# Altium PCB Capybara.PcbDoc (part 3 of 5)
Units mil, origin at the board's own origin, x right, y up, seen from the top; angles counter-clockwise.
Board outline 2270 x 2270 mil, 4 copper layers (Top Layer, GND, Signal, Bottom Layer), stack 61.8 mil thick; 394 components, 234 nets, 1155 pads, 211 vias.
Unrouted connection lines stored in the file: 4.
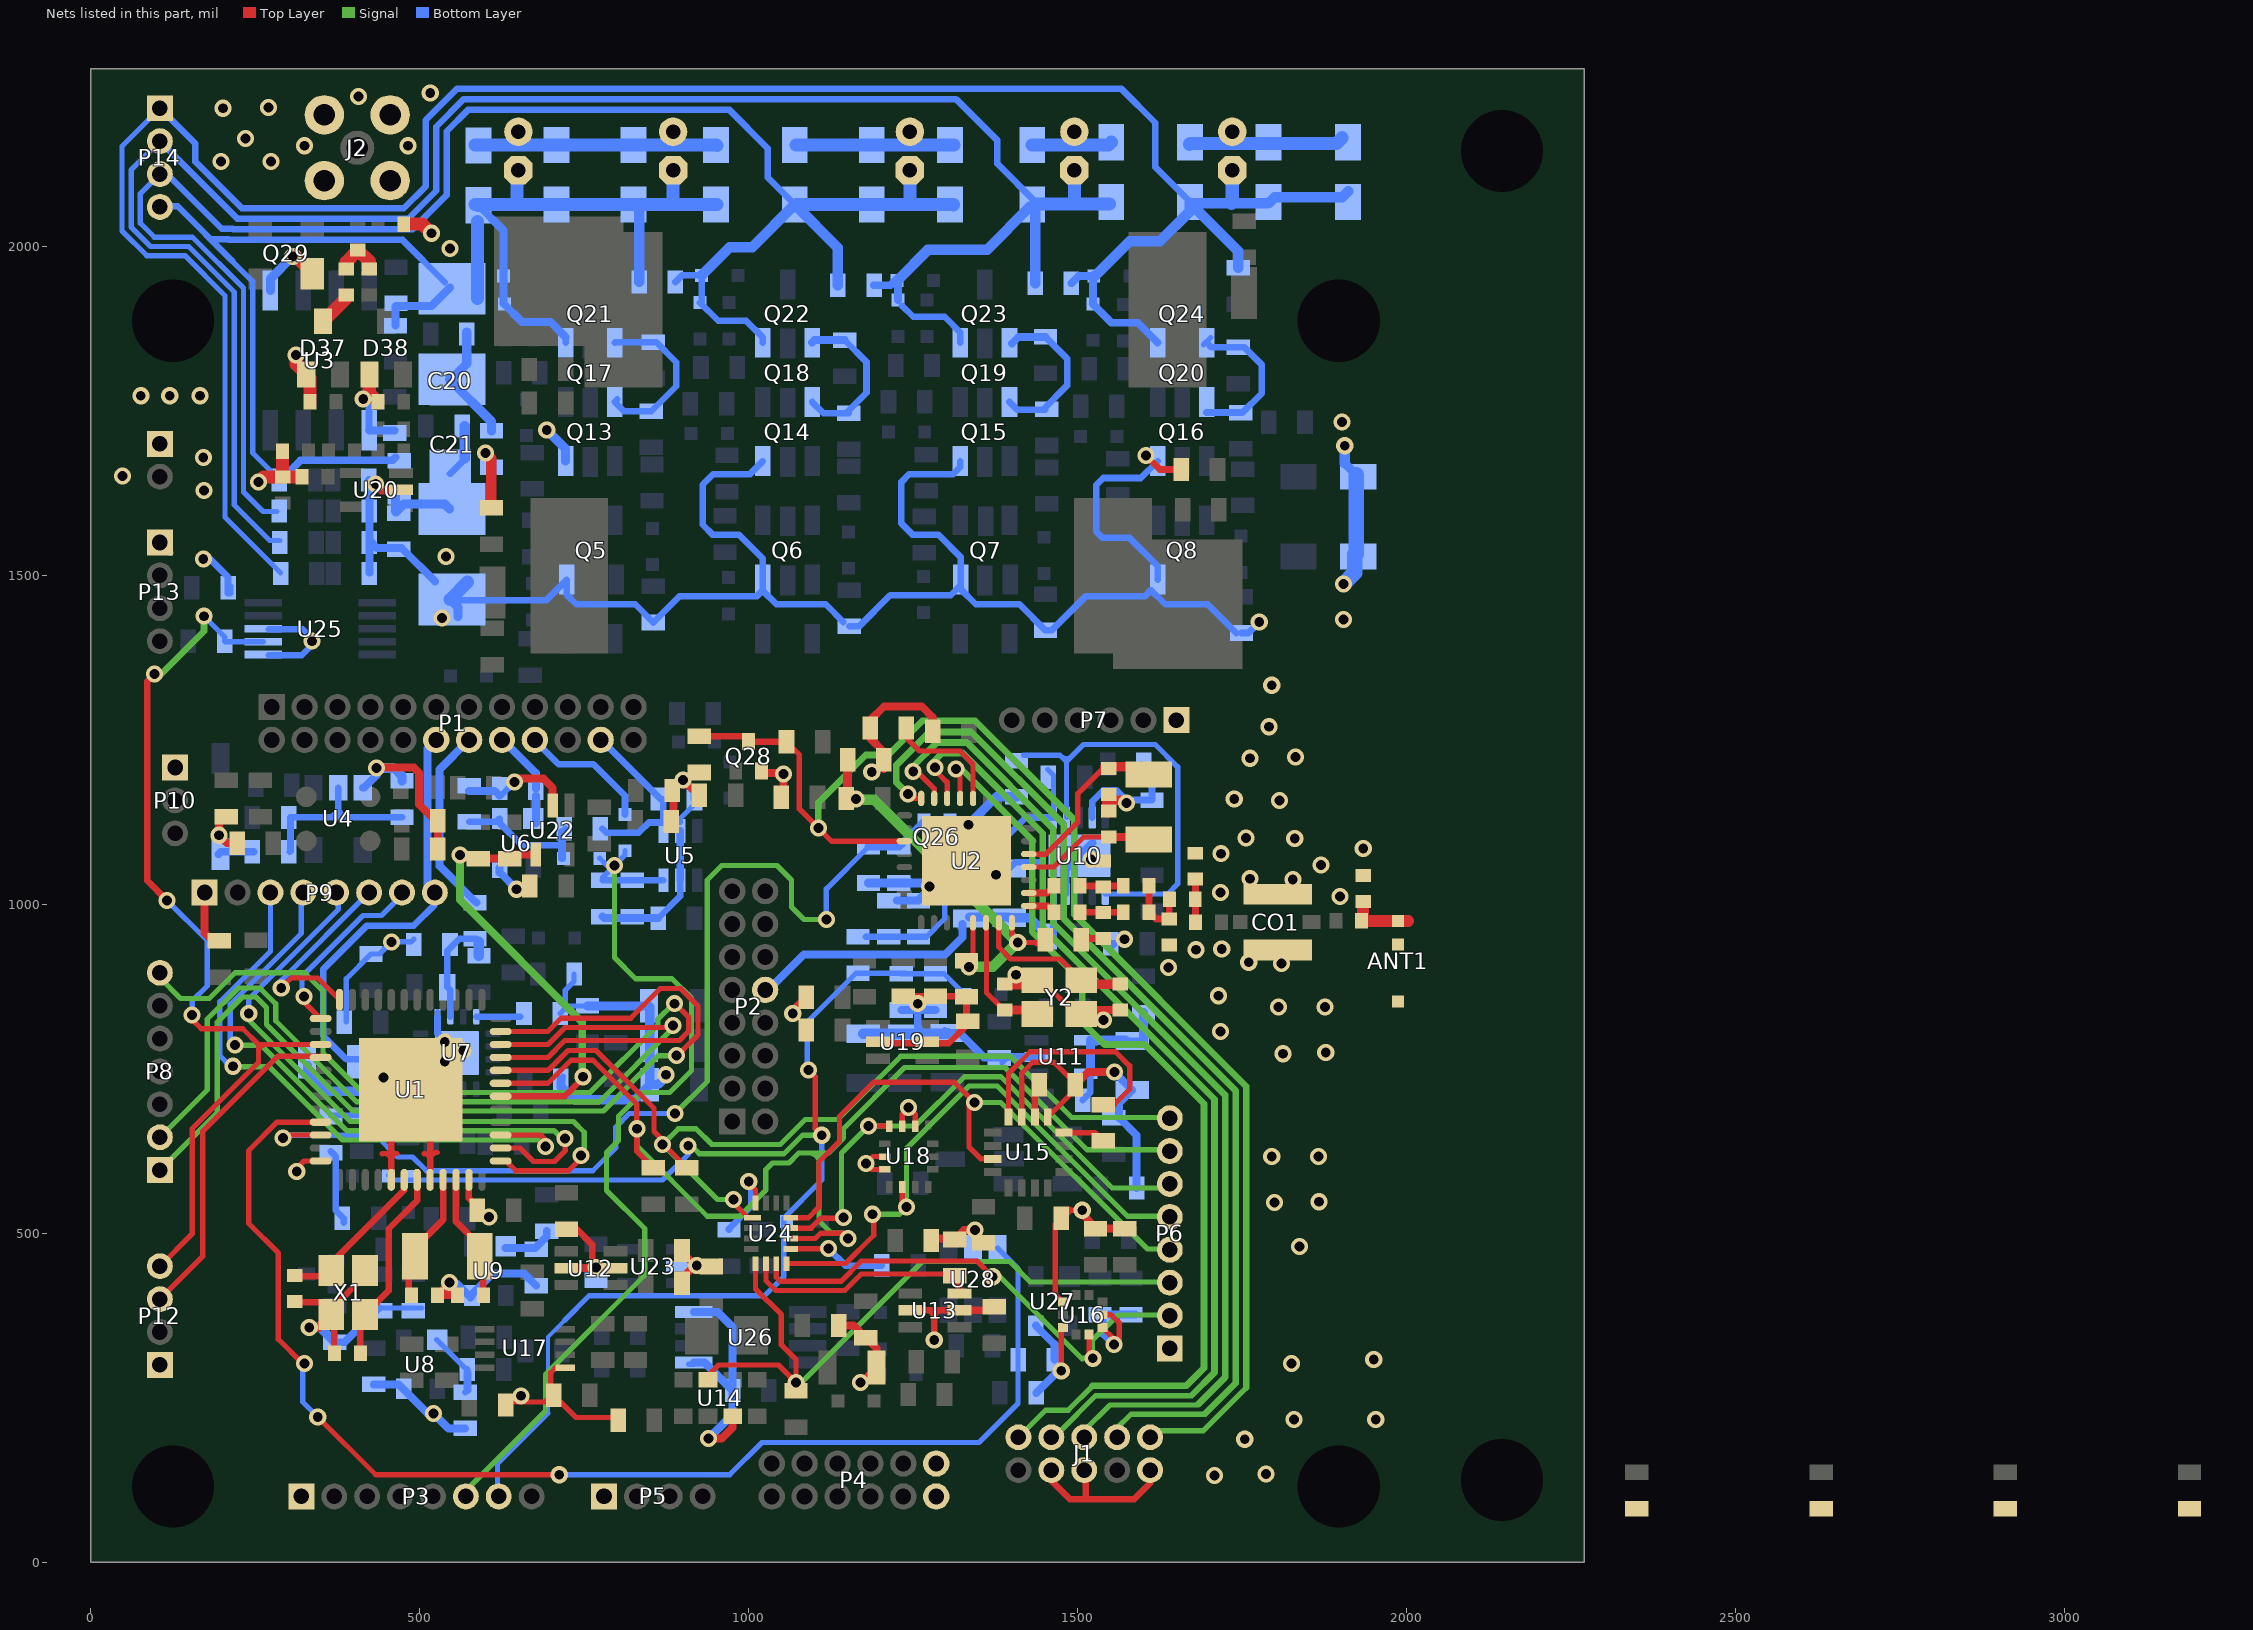
[diagram p4: the nets of this part, all layers, seen from the top]

## Part data (continued)
P2: Digi-Key Part Number=S9015E-08-ND, Manufacturer="Sullins Connector Solutions", Manufacturer Part Number=GRPB082VWVN-RC, Distributor=Digikey, Distributor Part Number=S9015E-08-ND
P3 P6 P9: "Header, 8-Pin", Digi-Key Part Number=952-3361-ND, Distributor Part Number=855-M52-5000845, Manufacturer="Harwin Inc.", Manufacturer Part Number=M52-5000845, Distributor=Mouser, LatestRevisionDate=17-Jul-2002, LatestRevisionNote="Re-released for DXP Platform.", Mouser Part Number=855-M52-5000845, Publisher="Altium Limited"
P4: Digi-Key Part Number=S9015E-06-ND, Manufacturer="Sullins Connector Solutions", Manufacturer Part Number=GRPB062VWVN-RC, Distributor=Digikey, Distributor Part Number=S9015E-06-ND
P5: "Header, 4-Pin", Digi-Key Part Number=952-3358-ND, Distributor Part Number=855-M52-5000445, Manufacturer="Harwin Inc.", Manufacturer Part Number=M52-5000445, Distributor=Mouser, LatestRevisionDate=17-Jul-2002, LatestRevisionNote="Re-released for DXP Platform.", Mouser Part Number=855-M52-5000445, Publisher="Altium Limited"
P7: "Header, 6-Pin", Digi-Key Part Number=952-3359-ND, Distributor Part Number=855-M52-5000645, Manufacturer="Harwin Inc.", Manufacturer Part Number=M52-5000645, Distributor=Digikey, LatestRevisionDate=17-Jul-2002, LatestRevisionNote="Re-released for DXP Platform.", Mouser Part Number=855-M52-5000645, Publisher="Altium Limited"
P8: "Header, 7-Pin", Digi-Key Part Number=952-3360-ND, Distributor Part Number=855-M52-5000745, Manufacturer="Harwin Inc.", Manufacturer Part Number=M52-5000745, Distributor=Mouser, LatestRevisionDate=17-Jul-2002, LatestRevisionNote="Re-released for DXP Platform.", Mouser Part Number=855-M52-5000745, Publisher="Altium Limited"
P10: "Header, 3-Pin", Digi-Key Part Number=952-3357-ND, Distributor Part Number=855-M52-5000345, Manufacturer="Harwin Inc.", Manufacturer Part Number=M52-5000345, Distributor=Mouser, LatestRevisionDate=17-Jul-2002, LatestRevisionNote="Re-released for DXP Platform.", Mouser Part Number=855-M52-5000345, Publisher="Altium Limited"
P11: "Header, 2-Pin", Digi-Key Part Number=SAM9931-ND, Manufacturer="Samtec Inc.", Manufacturer Part Number=SLM-102-01-S-S, Distributor=Digikey, Distributor Part Number=SAM9931-ND, LatestRevisionDate=17-Jul-2002, LatestRevisionNote="Re-released for DXP Platform.", Publisher="Altium Limited"
P12 P13 P14: library part MHDR1X4, "Header, 4-Pin", Digi-Key Part Number=952-3358-ND, Distributor Part Number=855-M52-5000445, Manufacturer="Harwin Inc.", Manufacturer Part Number=M52-5000445, Distributor=Mouser, LatestRevisionDate=17-Jul-2002, LatestRevisionNote="Re-released for DXP Platform.", Mouser Part Number=855-M52-5000445, Publisher="Altium Limited"
Q1 Q2 Q3 Q4 Q17 Q18 Q19 Q20 Q21 Q22 Q23 Q24 Q30: library part MOSFET-P, "P-Channel MOSFET", Digi-Key Part Number=1727-2531-1-ND, Distributor Part Number=771-PMV30XPEAR, Manufacturer=Nexperia, Manufacturer Part Number=PMV30XPEAR, Distributor=Mouser, Mouser Part Number=771-PMV30XPEAR
Q5 Q6 Q7 Q8 Q13 Q14 Q15 Q16 Q31: library part MOSFET-N, "N-Channel MOSFET", Digi-Key Part Number=SI2302CDS-T1-E3CT-ND, Distributor Part Number=781-SI2302CDS-E3, Manufacturer="Vishay Siliconix", Manufacturer Part Number=SI2302CDS-T1-E3, Distributor=Mouser, Mouser Part Number=781-SI2302CDS-E3
  Q16: Note=DB
Q9 Q10 Q11 Q12: library part MOSFET-N, "N-Channel MOSFET", Digi-Key Part Number=DMN65D8L-7DICT-ND, Distributor Part Number=621-DMN65D8L-7, Manufacturer="Diodes Incorporated", Manufacturer Part Number=DMN65D8L-7, Distributor=Mouser, Mouser Part Number=621-DMN65D8L-7
Q25 Q26 Q28: library part MOSFET-N, "N-Channel MOSFET", Distributor Part Number=FDY302NZCT-ND, Manufacturer=Fairchild, Manufacturer Part Number=FDY302NZ, Distributor=Digi-Key
Q27: library part "Photo NPN", "NPN Phototransistor", Digi-Key Part Number=475-1268-1-ND, Distributor Part Number=720-SFH3710-3/4-Z, Manufacturer="OSRAM Opto Semiconductors Inc", Manufacturer Part Number="SFH 3710-3/4-Z", Distributor=Mouser, Mouser Part Number=720-SFH3710-3/4-Z
Q29: "N-Channel RF MOSFET 1GHz, 40mA", Digi-Key Part Number=BF2040E6814HTSA1CT-ND, Distributor Part Number=726-BF2040E6814HTSA1, Manufacturer="NXP Semiconductors", Manufacturer Part Number=BF2040E6814HTSA1, Distributor=Mouser, Mouser Part Number=726-BF2040E6814HTSA1
R1 R2 R3 R4 R77 R83 R85 R97 R112 R113 R114: "Chip Resistor (Surface Mount)", Distributor Part Number=311-47KDCT-ND, Manufacturer=Yageo, Manufacturer Part Number=RT0603DRD0747KL, Distributor=Digi-Key
R5 R6 R7 R8 R52 R64 R65: "Chip Resistor (Surface Mount)", Distributor Part Number=311-1.00MHRCT-ND, Manufacturer=Yageo, Manufacturer Part Number=RC0603FR-071ML, Distributor=Digi-Key
  R52: Note=DNP
R9 R10 R11 R12 R17 R18 R19 R20 R21 R22 R23 R24 R45 R58 R73 R79 R128 R129: library part Res, "Chip Resistor (Surface Mount)", Distributor Part Number=311-0.0GRCT-ND, Manufacturer=Yageo, Manufacturer Part Number=RC0603JR-070RL, Distributor=Digi-Key
  R58 R73 R79: Note=DNP
R13 R14 R15 R16: library part Res, "Chip Resistor (Surface Mount)", Distributor Part Number=311-470KHRCT-ND, Manufacturer=Yageo, Manufacturer Part Number=RC0603FR-07470KL, Distributor=Digi-Key
  R16: Note=DB
R25 R26 R27 R28 R29 R30 R31 R32 R33 R34 R35 R36 R37 R40 R41 R42 R43 R44 R46 R47 R49 R50 R54 R56 R59 R60 R61 R62 R63 R74 R75 R76 R80 R87 R88 R105: "Chip Resistor (Surface Mount)", Distributor Part Number=311-0.0GRCT-ND, Manufacturer=Yageo, Manufacturer Part Number=RC0603JR-070RL, Distributor=Digi-Key
  R29 R30 R31 R32 R40 R63 R87 R88: Note=DNP
  R33: Config=top, Note=DNP
  R34: Config=*,series, Note=DNP
  R35: Config=bottom,series, Note=DNP
  R36 R37: Config=parallel
  R59: Note=BRIDGE
R38 R39 R92 R94 R95 R115: "Chip Resistor (Surface Mount)", Distributor Part Number=311-10.0KHRCT-ND, Manufacturer=Yageo, Manufacturer Part Number=RC0603FR-0710KL, Distributor=Digi-Key
  R38 R39: Note=DNP
R48: "Chip Resistor (Surface Mount)", Distributor Part Number=311-47GRCT-ND, Manufacturer=Yageo, Manufacturer Part Number=RC0603JR-0747RL, Distributor=Digi-Key
R51: "Chip Resistor (Surface Mount)", Manufacturer=Yageo, Distributor=Digi-Key
R53 R57 R86 R89 R90 R96 R98 R108 R125 R131: "Chip Resistor (Surface Mount)", Distributor Part Number=311-10MGRCT-ND, Manufacturer=Yageo, Manufacturer Part Number=RC0603JR-0710ML, Distributor=Digi-Key
R55: "Chip Resistor (Surface Mount)", Distributor Part Number=541-1.37MLCT-ND, Manufacturer="Vishay Dale", Manufacturer Part Number=CRCW04021M37FKED, Distributor=Digi-Key
R66: "Chip Resistor (Surface Mount)", Distributor Part Number=YAG2319CT-ND, Manufacturer=Yageo, Manufacturer Part Number=RT0603FRE07100KL, Rating=1%, Distributor=Digi-Key
R67: "Chip Resistor (Surface Mount)", Distributor Part Number=541-8.20MHCT-ND, Manufacturer="Vishay Dale", Manufacturer Part Number=CRCW06038M20FKEA, Rating=1%, Distributor=Digi-Key
R68: "Chip Resistor (Surface Mount)", Distributor Part Number=71-CRCW0603-2.43M-E3, Manufacturer=Vishay, Manufacturer Part Number=CRCW06032M43FKEA, Distributor=Mouser, Mouser Part Number=71-CRCW0603-2.43M-E3
R69: "Chip Resistor (Surface Mount)", Distributor Part Number=311-4.70MHRCT-ND, Manufacturer="Generic Chip Res (TBD)", Manufacturer Part Number=RC0603FR-074M7L, Rating=1%, Distributor=Digi-Key
R70 R71: "Chip Resistor (Surface Mount)", Distributor Part Number=YAG3327CT-ND, Manufacturer=Yageo, Manufacturer Part Number=RC0603FR-071M6L, Rating=1%, Distributor=Digi-Key
R72: "Chip Resistor (Surface Mount)", Distributor Part Number=541-3.30MHCT-ND, Manufacturer="Vishay Dale", Manufacturer Part Number=CRCW06033M30FKEA, Rating=1%, Distributor=Digi-Key
R78: "Chip Resistor (Surface Mount)", Distributor Part Number=311-820KHRCT-ND, Manufacturer=Yageo, Manufacturer Part Number=RC0603FR-07820KL, Distributor=Digi-Key
R81: "Chip Resistor (Surface Mount)", Distributor Part Number=311-200KHRCT-ND, Manufacturer=Yageo, Manufacturer Part Number=RC0603FR-07200KL, Distributor=Digi-Key
R82 R130 R132 R133 R134 R135: "Chip Resistor (Surface Mount)", Manufacturer="Generic Chip Res (TBD)"
  R82: Note=DNP
R84: "Chip Resistor (Surface Mount)", Distributor Part Number=311-2543-1-ND, Manufacturer=Yageo, Manufacturer Part Number=RT0603DRE0733KL, Distributor=Digi-Key
R91: "Chip Resistor (Surface Mount)", Distributor Part Number=MCT0603-22.0-CFCT-ND, Manufacturer="Vishay Beyschlag", Manufacturer Part Number=MCT06030C2209FP500, Distributor=Digi-Key
R93 R103 R124 R126: "Chip Resistor (Surface Mount)", Distributor Part Number=YAG2319CT-ND, Manufacturer=Yageo, Manufacturer Part Number=RT0603FRE07100KL, Distributor=Digi-Key
R99: "Chip Resistor (Surface Mount)", Distributor Part Number=P0.0JCT-ND, Manufacturer="Panasonic Electronic Components", Manufacturer Part Number=ERJ-2GE0R00X, Distributor=Digi-Key
R100: "Chip Resistor (Surface Mount)", Digi-Key Part Number=P560KLCT-ND, Manufacturer=Panasonic, Manufacturer Part Number=ERJ-2RKF5603X, Distributor=Digi-Key, Distributor Part Number=P560KLCT-ND
R101: "Chip Resistor (Surface Mount)", Digi-Key Part Number=P22.0KLCT-ND, Manufacturer=Panasonic, Manufacturer Part Number=ERJ-2RKF2202X, Distributor=Digi-Key, Distributor Part Number=P22.0KLCT-ND
R102: "Chip Resistor (Surface Mount)", Digi-Key Part Number=P220KLCT-ND, Manufacturer=Panasonic, Manufacturer Part Number=ERJ-2RKF2203X, Distributor=Digi-Key, Distributor Part Number=P220KLCT-ND
R104: "Chip Resistor (Surface Mount)", Distributor Part Number=541-1.5KGCT-ND, Manufacturer="Vishay Dale", Manufacturer Part Number=CRCW06031K50JNEA, Distributor=Digi-Key
R106: "Chip Resistor (Surface Mount)", Distributor Part Number=311-750KHRCT-ND, Manufacturer=Yageo, Manufacturer Part Number=RC0603FR-07750KL, Distributor=Digi-Key
R107: "Chip Resistor (Surface Mount)", Distributor Part Number=311-240KHRCT-ND, Manufacturer=Yageo, Manufacturer Part Number=RC0603FR-07240KL, Distributor=Digi-Key
R109: "Chip Resistor (Surface Mount)", Distributor Part Number=541-4.22MHCT-ND, Manufacturer="Vishay Dale", Manufacturer Part Number=CRCW06034M22FKEA, Distributor=Digi-Key
R110 R111: "Chip Resistor (Surface Mount)", Distributor Part Number=311-4.7KJRCT-ND, Manufacturer=Yageo, Manufacturer Part Number=RC0402JR-074K7L, Distributor=Digi-Key
R116 R117 R118 R119: "Chip Resistor (Surface Mount)", Distributor Part Number=311-4.70MHRCT-ND, Manufacturer="Generic Chip Res (TBD)", Manufacturer Part Number=RC0603FR-074M7L, Distributor=Digi-Key
R120 R121 R122 R123: "Chip Resistor (Surface Mount)", Distributor Part Number=541-20MAHCT-ND, Manufacturer="Vishay Dale", Manufacturer Part Number=CRCW060320M0JPEAHR, Distributor=Digi-Key
R127: library part Res, "Chip Resistor (Surface Mount)", Distributor Part Number=311-330KHRCT-ND, Manufacturer=Yageo, Manufacturer Part Number=RC0603FR-07330KL, Distributor=Digi-Key
S1 S2: library part TrisolX_Solar_Wings, "TrisolX Solar Wings", DataSheet=http://www.trisolx.com/wp-content/uploads/2015/03/TrisolX-Solar-Wing-Data-Sheet1.pdf, Manufacturer=TrisolX, Manufacturer Part Number="TrisolX Solar Wings"
U1: library part "MSP430FR5994 48-pin", "MSP430 - 48LQFP or 48QFN", Digi-Key Part Number=296-45416-1-ND, Distributor Part Number=595-P430FR5994IRGZR, Manufacturer="Texas Instruments", Manufacturer Part Number=MSP430FR5994IRGZR, Distributor=Mouser, Mouser Part Number=595-P430FR5994IRGZR
U2: "Imported", Alternate_PartNumber=CC2650F128RHBT, Digi-Key Part Number=296-41955-1-ND, Distributor Part Number=595-CC2650F128RHBT, Manufacturer="Texas Instruments", CompType=IC, Distributor=Mouser, Manufacturer Part Number=CC2650F128RHBT, MountType=SMT, Mouser Part Number=595-CC2650F128RHBT, PackageReference=RHB0032E, PartNumber=CC2650F128RHBR, PIN_COUNT=33, RefDes=RefDes, RoHS=Y, TYPE=TYPE
U3: library part ALD9100xx, Digi-Key Part Number=1014-1281-5-ND, Manufacturer="Advanced Linear Devices Inc.", Manufacturer Part Number=ALD910021SAL, Mouser Part Number=585-ALD910021SAL, Distributor=Digikey, Distributor Part Number=1014-1281-5-ND
U4: "IC DETECTOR OPEN-DRAIN", Digi-Key Part Number=NCP301HSN30T1GOSCT-ND, Distributor Part Number=863-NCP301HSN30T1G, Manufacturer="ON Semiconductor", Manufacturer Part Number=NCP301HSN30T1G, Distributor=Mouser, Mouser Part Number=863-NCP301HSN30T1G, Name=NCP301HSN
U5 U12 U13 U19: library part SIP32431, Digi-Key Part Number=SIP32431DR3-T1GE3CT-ND, Distributor Part Number=781-SIP32431DR3-GE3, Manufacturer="Vishay Semiconductors", Manufacturer Part Number=SIP32431DR3-T1GE3, Distributor=Mouser, Mouser Part Number=781-SIP32431DR3-GE3
U6: "IC DETECTOR OPEN-DRAIN", Digi-Key Part Number=BU4917F-TR-ND, Distributor Part Number=BU4917F-TR, Manufacturer="ROHM Semiconductor", Mouser Part Number=755-BU4917F-TR, Distributor="Quest Components", Manufacturer Part Number=BU4917F-TR, Name=BU49
U7: Digi-Key Part Number=296-29741-1-ND, Distributor Part Number=595-BQ25504RGTR, Manufacturer=BQ25504RGTT, Manufacturer Part Number="Texas Instruments", Distributor=Mouser, Mouser Part Number=595-BQ25504RGTR
U8 U9: "IC DETECTOR CMOS", Digi-Key Part Number=BU4924F-TR-ND, Distributor Part Number=BU4924F-TR, Manufacturer="ROHM Semiconductor", Mouser Part Number=755-BU4924F-TR, Distributor="Quest Components", Manufacturer Part Number=BU4924F-TR, Name=BU49
U10: Digi-Key Part Number=296-27017-1-ND, Manufacturer="Texas Instruments", Manufacturer Part Number=TPS61200DRCR, Mouser Part Number=595-TPS61200DRCR, Distributor=Digi-Key, Distributor Part Number=296-27017-1-ND
U11: library part CMP-0329-00079-2, "Low-Input Voltage 40 mA Current Limited Load Switch, 400 mOhms rDS(On), -40 to 85 degC, 5-pin SC70 (DCK), Green (RoHS & no Sb/Br)", Adjustable Current Limit(Min)(A)=0.04, Digi-Key Part Number=296-25316-1-ND, Manufacturer="Texas Instruments", Mouser Part Number=595-TPS22943DCKR, Code_JEDEC=MO-203-AA, ComponentLink1Description=Datasheet, ComponentLink1URL=http://www.ti.com/general/docs/lit/getliterature.tsp?genericPartNumber=TPS22943&fileType=pdf, DatasheetVersion=SLVS832C, Distributor=Digi-Key, Distributor Part Number=296-25316-1-ND, Eco-Plan="Green (RoHS & no Sb/Br)", Enable/Shutdown="Active High", Iq(Typ)(uA)=40, Manufacturer Part Number=TPS22943DCKR, Mounting Technology="Surface Mount", Note=DNP, Number of FETs=1, PackageDescription="5-Pin Plastic Small-Outline Package, 2 x 1.3 mm Body, 0.65 mm Pitch, 2.1 mm Lead Span", PackageReference=DCK0005A, PackageVersion="revG, Jan-2007", PartNumber=TPS22943DCKR, rDS(on) per FET(Typ)(mOhms)=400, SubFamily="Current Limited Switch", Vin(Max)(V)=5.5, Vin(Min)(V)=1.62
U14: "Avago APDS-9960 digital proximity, ambient light, RGB, and gesture sensor.", Digi-Key Part Number=516-3480-1-ND, Distributor Part Number=630-APDS-9960, Manufacturer="Broadcom Limited", Distributor=Mouser, Manufacturer Part Number=APDS-9960, Mouser Part Number=630-APDS-9960, PROD_ID=SEN-12005
U15: "IC COMPASS 3 AXIS I2C 16LCC SMD", Digi-Key Part Number=342-1082-1-ND, Manufacturer=Honeywell, Manufacturer Part Number=HMC5883L-TR, Distributor=eBay
U16: Digi-Key Part Number=497-16265-1-ND, Distributor Part Number=511-LPS22HBTR, Manufacturer=STMicroelectronics, Manufacturer Part Number=LPS22HBTR, Distributor=Mouser, Mouser Part Number=511-LPS22HBTR
U17: "I2C Level Shifter", Digi-Key Part Number=296-46174-1-ND, Distributor Part Number=595-PCA9306DCURG4, Manufacturer="Texas Instruments", Manufacturer Part Number=PCA9306DCURG4, Distributor=Mouser, Mouser Part Number=595-PCA9306DCURG4
U18: Digi-Key Part Number=497-15383-1-ND, Distributor Part Number=511-LSM6DS3TR, Manufacturer="ST Microelectronics", Manufacturer Part Number=LSM6DS3TR, Distributor=Mouser, Mouser Part Number=511-LSM6DS3TR, Name=LSM6DS3, PurchaseNote="or Farnell 2474253"
U20: library part NCS2200, "Comparator: On Semi 10uA Comparator", Digi-Key Part Number=NCS2200SQ2T2GOSCT-ND, Distributor Part Number=863-NCS2200SQ2T2G, Manufacturer="ON Semiconductor", Manufacturer Part Number=NCS2200SQ2T2G, Distributor=Mouser, Mouser Part Number=863-NCS2200SQ2T2G
U21: "Knowles Analog Top MEMS Microphone", Digi-Key Part Number=423-1134-1-ND, Distributor Part Number=721-SPU0414HR5H-SB, Manufacturer=Knowles, Manufacturer Part Number=SPU0414HR5H-SB, Distributor=Mouser, Mouser Part Number=721-SPU0414HR5H-SB
U22: library part "OPA333, 2333", "Low power opamp", Digi-Key Part Number=MAX9914EXK+TCT-ND, Distributor Part Number=700-MAX9914EXKT, Manufacture="Maxim Integrated", Manufacture Part Number=MAX9914EXK+T, Distributor=Mouser, Mouser Part Number=700-MAX9914EXKT
U23: library part "OPA333, 2333", "Low power opamp", Digi-Key Part Number=296-47441-1-ND, Distributor Part Number=595-TLV521DCKR, Manufacturer="Texas Instruments", Manufacturer Part Number=TLV521DCKR, Distributor=Mouser, Mouser Part Number=595-TLV521DCKR
U24: Digi-Key Part Number=FXL6408UMXCT-ND, Distributor Part Number=512-FXL6408UMX, Manufacturer="ON Semiconductor / Fairchild", Manufacturer Part Number=FXL6408UMX, Distributor=Mouser, Mouser Part Number=512-FXL6408UMX, Name=FXL6408
U25: Digi-Key Part Number=296-38849-1-ND, Manufacturer="Texas Instruments", Manufacturer Part Number=ADS1115IDGSR, Mouser Part Number=595-ADS1115IDGSR, Distributor=Digikey, Distributor Part Number=296-38849-1-ND
U26: Digi-Key Part Number=MCP4541-104E/MS-ND, Distributor Part Number=579-MCP4541-104E/MS, Manufacturer=Microchip, Manufacturer Part Number=MCP4541T-104E/MS, Distributor=Mouser, Mouser Part Number=579-MCP4541-104E/MS
U27: "IC DETECTOR CMOS", Digi-Key Part Number=BU4917F-TR-ND, Distributor Part Number=BU4917F-TR, Manufacturer="ROHM Semiconductor", Mouser Part Number=755-BU4917F-TR, Distributor="Quest Components", Manufacturer Part Number=BU4917F-TR, Name=BU49
U28: Digi-Key Part Number=296-12134-1-ND, Distributor Part Number=595-REG710NA-2.7/250, Manufacturer="Texas Instruments", Manufacturer Part Number=REG710NA-2.7/250, Distributor=Mouser, Mouser Part Number=595-REG710NA-2.7/250
X1: library part "XTAL 4-pins", "Crystal - 4-Pin Surface Mount", Digi-Key Part Number=XC1557CT-ND, Distributor Part Number=520-ECS-240-8-36CKM, Manufacturer="ECS Inc.", Manufacturer Part Number=ECS-240-8-36CKM-TR, Rating=8pF, Distributor=Mouser, Mouser Part Number=520-ECS-240-8-36CKM
X2: library part "XTAL 2-pins", "Crystal - 2-Pin Surface Mount", Digi-Key Part Number=XC2162CT-ND, Distributor Part Number=520-.327-6-34QCST, Manufacturer="ECS Inc.", Manufacturer Part Number=ECS-.327-6-34QCS-TR, Rating=6pF, Distributor=Mouser, Mouser Part Number=520-.327-6-34QCST
Y1: library part XTAL, "Crystal Oscillator", Digi-Key Part Number=XC2162CT-ND, Distributor Part Number=520-.327-6-34QCST, Manufacturer="ECS Inc.", Manufacturer Part Number=ECS-.327-6-34QCS-TR, Rating=6pF, Distributor=Mouser, Mouser Part Number=520-.327-6-34QCST
Y2: library part ABM11_CERAMIC_SMD_CRYSTALABM11, Digi-Key Part Number=XC1557CT-ND, Distributor Part Number=520-ECS-240-8-36CKM, Manufacturer="ECS Inc.", Manufacturer Part Number=ECS-240-8-36CKM-TR, Rating=8pF, Distributor=Mouser, Mouser Part Number=520-ECS-240-8-36CKM

## Free pads (board coordinates)
  round 110 hole 125 unplated paste-200 mask-200: 2(2145,2145) 3(125,115) 3(125,1887) 3(1897,115) 3(1897,1887) 3(2145,125)

## Via types
v1: diameter 26, hole 15, Top Layer to Bottom Layer, tented both sides, 209 vias
v2: diameter 26, hole 15, Top Layer to Bottom Layer, tented bottom, 2 vias

## Nets (pads, with @x,y where several pads share a name; then routed paths per layer and width w, separated by ;. In a path a pad name is that pad's centre, name@x,y a point inside that pad or via, vN(x,y) a via of type N, cw(c..) or ccw(c..) an arc to the next point about the centre after c; other vN are vias at no path point)
ANT_N: C90.2 U2.2 | length 43.2
  Top Layer w10.42: U2.2@1425.59,1017.28 1453.59,1017.28 C90.2@1464.31,1028
ANT_P: C87.2 U2.1 | length 42.7
  Top Layer w10.42: U2.1@1425.59,997.59 1454.72,997.59 C87.2@1464.31,988
APDS_INT: P6.3 R92.1 U14.2 U24.5 | length 1013.2
  Top Layer w8: U14.2@938.07,277.13 938.07,284.07 954,300 1045,300 v1(1072,273) 1072,308 1049.56,330.44 1049.56,376.44 1010.38,415.62 U24.5@1010.38,454
  Signal w8: v1(1072,273) 1080,273 1264,457 1397,457 1428,426 P6.3@1631,426
APDS_SW: R89.2 U13.3 U24.6 | length 373.7
  Top Layer w8: U24.6@1026.13,454 1026.13,427.87 1041,413 1146,413 1171,438 1314.56,438 1317.56,435 1320.4,437.84 R89.2@1324,441.44
  Top Layer w12: U13.3@1320.4,408.59 R89.2@1320.4,437.84
AUX_0: P9.5 U1.1 | length 994.7
  Top Layer w8: U1.1@623,609.89 631.11,609.89 646,595 726,595 v1@751,620
  Signal w8: v1@233,834 233,831.4 394.4,670 733.53,670 750,653.53 v1@750,626
  Bottom Layer w8: v1(240,834) 240,856.19 376,992.19 P9.5@376,1007
  other v1: 745,618
AUX_1: P9.4 U1.2 | length 972.9
  Top Layer w8: U1.2@623,629.57 652.43,629.57 673,609 705,609 721,625 v1(721,644)
  Signal w8: v1@214,786 258.6,786 388.6,656 704,656 v1@724,636
  Bottom Layer w8: v1(219,786) 212,793 212,847.99 320,955.99 P9.4@320,1007
AUX_2: P9.3 U1.3 | length 910.2
  Top Layer w8: U1.3@623,649.26 683.74,649.26 v1@695,638
  Signal w8: v1@213,753 271.8,753 382.8,642 691,642 v1@695,638
  Bottom Layer w8: v1@213,753 196,770 196,851.79 273,928.79 P9.3@273,1018
  other v1: 691,632 216,754
AUX_3: P8.7 U1.9 | length 1363.6
  Top Layer w8: U1.9@623,767.37 694.77,767.37 720.4,793 894.53,793 908,806.47 908,806.8 909,807.8 909,828 v1@887.5,849.5
  Signal w8: P8.7@105,896 105,888.47 136.47,857 180,857 219,896 325,896 353,868 353,774 413,714 759,714 862,817 862,825.53 885.47,849 v1(887,849)
AUX_4: P8.2 U1.10 | length 1344.1
  Top Layer w8: U1.10@623,787.06 694.65,787.06 720.57,812.97 881.97,812.97 v1(885,816)
  Signal w8: P8.2@105,646 177,718 177,825.47 224.53,873 256.8,873 281,848.8 281,823 404,700 773,700 v1@885,812
AUX_5: P8.1 U1.11 | length 1527.5
  Top Layer w8: U1.11@623,806.74 694.54,806.74 714.77,826.97 820.57,826.97 865.6,872 896.53,872 923,845.53 923,802 922,801 922,800.67 900.33,779 900,779 v1@890,769
  Signal w8: P8.1@105,596 192,683 192,820.67 230.33,859 251,859 267,843 267,817.2 398.2,686 779,686 863,770 v1(890,770) ; v1@887,769 v1@890,769
BANK_1: C3.1 C4.1 C5.1 C15.1 D16.1 D24.2 P14.1 Q24.2 R31.2 R32.1 R120.2 | length 3587.9
  Bottom Layer w8: P14.1@105,2210 47.31,2152.31 47.31,2023.69 85,1986 143,1986 204,1925 204,1588.44 R120.2@288.44,1504
  Bottom Layer w10: P14.1@105,2210 159,2156 159,2128.63 229.63,2058 475.75,2058 509,2091.25 509,2192 557,2240 1566,2240 1618,2188 1618,2120.72 C3.1@1671,2067.72 ; C4.1@1788,2065.72 C4.1@1790,2067.72 C4.1@1791,2066.72
  Bottom Layer w12: R31.2@1490.56,1944 1501.56,1955 D24.2@1524.44,1955 1523,1953.56 D16.1@1523,1912.56 1551.56,1884 1591.31,1884 Q24.2@1621.6,1853.71 ; C3.1@1670,2066.72 C3.1@1671,2067.72
  Bottom Layer w16: D24.2@1524.44,1955 1526,1955 1579,2008 1625,2008 1670,2053 1670,2066.72 C3.1@1671,2065.72 ; R32.1@1744,1967.56 1744,1992.72 C3.1@1671,2065.72 ; C4.1@1788,2065.72 1734,2065.72 C3.1@1671,2065.72 ; C4.1@1791,2066.72 1799.28,2075 1902.28,2075 C5.1@1911,2083.72
  Bottom Layer w20: 1734,2065.72 1735,2066.72 C15.1@1735,2115.47
BANK_2: C6.1 C7.1 C16.1 D15.1 D23.2 P14.2 Q23.2 R30.2 R31.1 R121.2 | length 3098.3
  Bottom Layer w8: P14.2@105,2149 P14.2@105,2150 ; P14.2@105,2160 61.31,2116.31 61.31,2029.48 90.8,2000 148.8,2000 218,1930.8 218,1607 272,1553 R121.2@287.44,1553
  Bottom Layer w10: P14.2@105,2160 223,2042 482.37,2042 525,2084.63 525,2182 567,2224 1315,2224 1378,2161 1378,2125.61 C6.1@1438.88,2064.72 ; D15.1@1233,1910 1250,1893 1298,1893 1321.6,1869.4 Q23.2@1321.6,1853.71
  Bottom Layer w12: R30.2@1190.56,1941 1215.56,1941 1227,1952.44 D23.2@1227,1949.56 ; D23.2@1225.44,1948 D23.2@1227,1949.56 ; D15.1@1227,1918.56 D23.2@1227,1949.56 ; C6.1@1427.36,2060.09 C6.1@1431,2063.72 ; C7.1@1548,2064.72 C7.1@1551,2067.72
  Bottom Layer w16: D23.2@1227,1949.56 1272.44,1995 1362.28,1995 1427.36,2060.09 1435.44,2052.01 R31.1@1435.44,1944
  Bottom Layer w20: C6.1@1438.88,2064.72 1494,2064.72 ; C16.1@1495,2115.47 1495,2065.72 1494,2064.72 ; C7.1@1548,2064.72 1494,2064.72
BANK_3: C8.1 C9.1 C10.1 C17.1 D14.1 D22.2 P14.3 Q22.2 R29.2 R30.1 R122.2 | length 2708
  Bottom Layer w8: P14.3@105,2110 75.31,2080.31 75.31,2035.28 96.6,2014 154.6,2014 232,1936.6 232,1627 261.72,1597.28 R122.2@282.72,1597.28
  Bottom Layer w10: P14.3@110.31,2105.31 120.69,2105.31 199,2027 215.37,2027 216.37,2026 489,2026 541,2078 541,2175 574,2208 970,2208 1029,2149 1029,2104.72 C8.1@1070,2063.72 ; R29.2@888.56,1946 898.56,1956 D22.2@928.44,1956 928.44,1917 D14.1@926,1914.56 953.56,1887 996,1887 1021.6,1861.4 Q22.2@1021.6,1853.71
  Bottom Layer w14: C9.1@1311.5,2063.22 C9.1@1312,2063.72
  Bottom Layer w16: D22.2@928.44,1956 971.44,1999 1005.28,1999 C8.1@1070,2063.72 1135.44,1998.28 R30.1@1135.44,1941
  Bottom Layer w20: C8.1@1072,2063.72 C10.1@1187,2063.72 1246,2063.72 ; C17.1@1245,2115.47 1245,2064.72 1246,2063.72 ; C9.1@1311.5,2063.22 1311,2063.72 C9.1@1306,2063.72 1246,2063.72
BANK_4: C11.1 C12.1 C13.1 C14.1 C18.1 C19.1 C20.1 C21.1 D13.1 D21.2 P14.4 Q21.2 R29.1 R37.1 R38.1 R40.1 R123.2 | length 2265.7
  Bottom Layer w8: 182,2011 246,1947 246,1686.44 R123.2@286.44,1646
  Bottom Layer w10: P14.4@105,2050 116,2061 132,2061 215,1978 ; 182,2011 208.75,2011 209.75,2010 473.73,2010 C21.1@538,1945.73 ; D21.2@627,1950.56 D21.2@627.44,1951 ; Q21.2@721.6,1853.71 Q21.2@721.6,1862.4
  Bottom Layer w12: R123.2@286.44,1646 290,1646 319,1675 458.44,1675 R37.1@463,1679.56 ; R38.1@463,1879.56 463,1908.44 464,1909.44 517.71,1909.44 C20.1@546,1937.73 ; C21.1@588,1956 C21.1@589,1955 ; C13.1@589,2062.72 627.44,2024.28 D21.2@627.44,1955 D21.2@627.44,1951 ; D21.2@627,1950.56 627,1913.56 655.56,1885 699,1885 Q21.2@721.6,1862.4
  Bottom Layer w14: C11.1@824,2063.72 C11.1@833.44,2054.28
  Bottom Layer w16: R29.1@833.44,1946 C11.1@833.44,2054.28
  Bottom Layer w20: C13.1@584,2063.72 C13.1@590,2063.72 ; C21.1@588,1920.8 588,1956 C13.1@588,2037.72 ; C13.1@589,2062.72 C13.1@590,2063.72 ; C19.1@639.75,2113.47 648,2113.47 648,2064.72 649,2063.72 ; C18.1@885,2115.47 885,2067.72 889,2063.72 ; C12.1@952,2063.72 C12.1@950,2063.72 889,2063.72 ; C13.1@590,2063.72 649,2063.72 ; 649,2063.72 C14.1@708,2063.72 824,2063.72 889,2063.72
BANK_INT: P12.4 R115.1 U1.27 U25.2 | length 1439
  Top Layer w8: P12.4@105,450 154,499 154,659 254.94,759.94 254.94,787.06 ; v1@149,830 v1@154,825 ; v1(154,832) v1@154,825 ; 254.94,776 cw(c265.47,776.47) 263.23,786.77 ; U1.27@349.38,787.06 254.94,787.06 ; v1@154,825 168,811 231,811 254.94,787.06
  Top Layer w10: v1(97,1350) 86,1339 86,1036 v1(116,1006)
  Signal w10: v1(97,1350) 107,1350 172,1415 v1@172,1433
  Bottom Layer w8: v1(116,1006) 177,945 177,876 154,853 v1(154,832) ; v1(172,1438) 203.56,1406.44 R115.1@203.56,1400 204.24,1399.31 U25.2@262.39,1399.31
BOOST_EN: C49.2 Q26.3 R77.2 R80.2 R83.2 U10.6 | length 513.9
  Bottom Layer w8: C49.2@1270,950.44 1298,978.44 1298,1068.56 Q26.3@1286,1080.56 ; R77.2@1454.44,1205 1463.23,1196.21 U10.6@1463.23,1132.02
  Bottom Layer w10: R80.2@1178,950.56 1231.88,950.56 1232,950.44 C49.2@1258,950.44 C49.2@1270,950.44 ; Q26.3@1286,1080.56 1369.56,1080.56 1421.02,1132.02 U10.6@1463.23,1132.02
BOOST_EN_OR: C48.1 D32.2 D33.2 D34.2 D35.2 P3.7 R80.1 R82.2 | length 2090.6
  Top Layer w8: v1(1091,748) 1101,738 1101,659 v1(1111,649)
  Signal w8: v1@911,635 925,621 1053.67,621 1081.67,649 v1(1111,649)
  Bottom Layer w6: 694.67,226.67 694.67,342.17 720,367.5
  Bottom Layer w8: D33.2@453,588.44 460.44,581 869,581 908,620 v1(908,633) ; P3.7@635,100 618,117 618,150 694.67,226.67 ; 720,367.5 757.5,405 1024,405 1053.44,434.44 1053.44,523.44 1111,581 v1(1111,649) ; v1@1089,748 1089,821 1163.44,895.44 R82.2@1238,895.44 ; R82.2@1232,894.56 C48.1@1284,894.56 1296.88,894.56 D35.2@1328.44,863
BOOST_IN: C44.2 C45.2 L2.1 P2.10 U10.5 | length 552.6
  Bottom Layer w10: U10.5@1463.1,1016 U10.5@1463.23,1015.87 L2.1@1463.23,951
  Bottom Layer w12: P2.10@1022,872 1032,872 1083.78,923.78 1298.78,923.78 1325,950 C45.2@1325,970
  Bottom Layer w14: C45.2@1336,980.6 1395,980.6 C44.2@1396,979.6 1427.4,979.6 L2.1@1456,951
BOOST_SW: C54.2 Q26.1 R86.2 U1.34 | length 1586.7
  Top Layer w8: v1@298,650 298.74,649.26 U1.34@349.38,649.26
  Signal w8: v1(888,682) 937,731 937,1037 959,1059 1043,1059 1065,1037 1065,996 1084,977 v1(1118,977)
  Bottom Layer w8: v1(292,645) 296,649 433,649 466,616 489,616 510,595 763,595 798,630 798,661.5 818.5,682 v1(888,682) ; v1(1118,977) 1118,1023.56 R86.2@1182,1087.56
  Bottom Layer w12: R86.2@1182,1087.56 C54.2@1228,1087.56 1228.43,1087.56 Q26.1@1266.31,1125.44
BQ_BEN: JU1.1 JU1.2 R61.2 R73.2 U7.11 | length 313.5
  Bottom Layer w8: JU1.2@365,679.56 R73.2@412,679.56 ; R73.2@426,674 520,674 546.63,700.63 U7.11@546.63,719
  Bottom Layer w10: JU1.1@365,624.44 372,617.44 372,534.94 384.44,522.5 R61.2@384.44,516
BQBP_EN: C36.2 D30.2 D31.2 P3.6 R53.2 U5.3 | length 1433.1
  Signal w8: P3.6@570,100 570,109 691,230 691,285.35 841.93,436.28 841.93,507.07 784,565 784,623 802,641 802,678 838,714 880,714 913,747 913,857.53 883.53,887 828,887 796,919 v1(796,1059)
  Bottom Layer w8: D30.2@773.56,1070 784.56,1059 v1(796,1059) ; C36.2@778,1036.56 778,1041 v1(796,1059) ; D31.2@812,1081.44 812,1075 v1(796,1059)
  Bottom Layer w10: C36.2@778,1036.56 R53.2@823,1036.56 U5.3@870.41,1036.6 U5.3@870.41,1036.6
BQBP_EN_VL: D31.1 P1.18 | length 198.8
  Bottom Layer w10: P1.18@676,1248 711,1213 764,1213 812,1165 D31.1@812,1136.56
BQBP_SP_IN: C32.2 P1.16 U6.2 | length 135.2
  Bottom Layer w12: P1.16@627,1249 676.56,1199.44 C32.2@676.56,1176 ; U6.2@676.56,1123.37 C32.2@676.56,1165
BQBP_SW_IN: C27.2 P1.22 R52.2 U5.4 | length 265.2
  Bottom Layer w10: P1.22@775,1246.44 P1.22@775,1250 ; P1.22@777,1249 866,1160 C27.2@868.44,1160 ; R52.2@777.56,1115 783.56,1109 833,1109 848.4,1124.4 870.41,1124.4 C27.2@870.41,1156.03
BQIN: P1.14 R54.1 | length 289.3
  Bottom Layer w12: P1.14@575,1250 530,1205 530,1058.56 R54.1@586,1002.56
BQOUT: C40.2 P1.12 P9.8 U7.14 | length 735.1
  Bottom Layer w10: U7.14@501.35,764.28 388.72,764.28 353,800 353,901 419.72,967.72 490.72,967.72 523,1000 P9.8@523,1018
  Bottom Layer w12: P9.8@523,1018 512,1029 512,1237 P1.12@525,1250
CP_EN: R131.2 U1.33 U28.3 | length 1971.9
  Top Layer w8: v1@322,302 285,339 285,470 240,515 240,626.01 282.94,668.94 U1.33@349.38,668.94 ; v1(345,221) 433,133 v1(712,133)
  Bottom Layer w8: v1@322,302 322,244 v1(345,221) ; v1@713,132 v1(712,133) 971,133 1020,182 1350.11,182 1409.44,241.33 1409.44,446.45 U28.3@1378.4,477.49
  other v1: 325,302
DBG35: P12.3 U1.28 | length 508.7
  Top Layer w8: P12.3@105,400 170,465 170,655 284,769 U1.28@349.01,769 ; U1.28@349.01,767 U1.28@349.38,767.37
DEV_RX: P9.7 U1.25 | length 282.8
  Top Layer w8: v1@321,855 321,854.8 U1.25@349.38,826.43
  Bottom Layer w8: v1@321,855 321,890.21 413.79,983 442,983 473,1014 P9.7@473,1018
  other v1: 324,860
DEV_TX: P9.6 U1.24 | length 312.9
  Top Layer w8: v1(289.54,872.79) 304.75,888 344.89,888 U1.24@377.92,854.97
  Bottom Layer w8: v1@289.54,868.79 v1(289.54,872.79) 289.54,884.54 P9.6@423,1018
FXL_INT: P6.8 R112.1 U1.8 U24.1 | length 1456.4
  Top Layer w8: U1.8@623,747.69 694.88,747.69 725.2,778 768,778 856,690 856,655 874,637 874,631.56 R112.1@906,599.56 ; v1(977,551.5) 977,546 999.38,523.62 U24.1@1005.77,523.62
  Signal w8: v1(869,635) v1@871,637 ; v1(977,551.5) 952.5,551.5 871,633 v1@871,637 ; P6.8@1631,676 1491,676 1398,769 1231,769 1135,673 1085.88,673 1047.88,635 944,635 920,659 893,659 v1@871,637
FXL_RST: P6.7 R113.1 U1.7 U24.10 | length 1698.4
  Top Layer w8: U1.7@623,728 694.99,728 729.99,763 763.2,763 830,696.2 v1(830,659) 830,624.56 R113.1@855,599.56 ; U24.10@1064.2,492.13 1101.13,492.13 1109,500 1143,500 v1(1151,492)
  Signal w8: v1(830,659) 830,633 937,526 988,526 988,528 1026,566 1026,597 1036,607 1061,607 1076,622 1103,622 ; 1092,622 cw(c1092.5,607.5) 1107,608 ; 1106.88,608.65 cw(c1120.62,608.26) 1121,622 ; v1(1151,492) 1143,500 1126,500 1107,519 1107,618 1103,622 ; P6.7@1631,626 1630,627 1514.4,627 1389.4,752 1237,752 1144,659 1144,645 1121,622 ; 1103,622 1121,622
G_SW0: Q20.1 Q24.1 R20.1 R24.1 | length 252.7
  Bottom Layer w8: Q24.1@1691.4,1850.71 Q24.1@1702.25,1861.56
  Bottom Layer w10: Q20.1@1695.44,1747.56 1750.56,1747.56 1780,1777 1780,1820 1753.44,1846.56 R24.1@1744,1846.56 1703.55,1846.56 Q24.1@1696.4,1853.71
G_SW1: Q19.1 Q23.1 R19.1 R23.1 | length 254.3
  Bottom Layer w10: Q19.1@1396.4,1763.71 1408.55,1751.56 R19.1@1447,1751.56 ; R19.1@1451,1751.56 R19.1@1447,1751.56 ; R23.1@1451,1862.56 1484,1829.56 1484,1788.56 R19.1@1447,1751.56
  Bottom Layer w12: Q23.1@1400.4,1852.71 1410.25,1862.56 R23.1@1451,1862.56
G_SW2: Q18.1 Q22.1 R18.1 R22.1 | length 251.4
  Bottom Layer w10: Q18.1@1096.4,1763.71 1113.55,1746.56 R18.1@1148,1746.56 ; R22.1@1146,1857.56 1179,1824.56 1179,1777.56 R18.1@1148,1746.56 ; R18.1@1152,1746.56 R18.1@1148,1746.56
  Bottom Layer w12: Q22.1@1096.4,1853.71 1100.25,1857.56 R22.1@1146,1857.56
G_SW3: Q17.1 Q21.1 R17.1 R21.1 | length 263.7
  Bottom Layer w10: Q21.1@796.4,1853.71 797.25,1854.56 859.44,1854.56 890,1824 890,1787.56 R17.1@852,1749.56 810.55,1749.56 Q17.1@796.4,1763.71 Q17.1@800.25,1767.56
GND: ANT1.2 ANT1.3 C1.2 C2.2 C3.2 C4.2 C5.2 C6.2 C7.2 C8.2 C9.2 C10.2 C11.2 C12.2 C13.2 C14.2 C15.2 C16.2 C17.2 C18.2 C19.2 C21.4 C22.1 C23.1 C24.1 C25.1 C26.1 C27.1 C28.1 C29.1 C30.1 C31.1 C32.1 C33.1 C34.1 C35.1 C36.1 C37.1 C38.2 C39.1 C40.1 C41.1 C42.1 C43.1 C44.1 C45.1 C46.1 C47.1 C48.2 C49.1 C50.1 C51.1 C52.1 C53.1 C54.1 C55.1 C56.1 C57.1 C58.1 C59.1 C60.1 C61.2 C62.2 C63.2 C64.2 C65.2 C67.2 C68.2 C69.1 C70.1 C71.1 C72.1 C73.1 C74.1 C75.1 C76.1 C77.1 C78.1 C79.1 C80.1 C81.2 C82.1 C83.1 C84.1 C85.2 C88.1 C89.1 C91.1 C92.1 C93.2 C95.1 C96.2 C98.2 C100.2 C102.1 C104.1 C105.1 C106.1 C107.1 C108.2 C109.1 C110.1 C111.2 C112.2 C113.2 C114.2 C115.1 C116.1 C117.1 C118.1 C120.1 C121.1 CO1.3 CO1.4 D28.1 D37.1 D38.1 FB2.1 J1.3 J1.5 J1.9 J2.2 L4.2 P3.1 P4.1 P4.2 P5.1 P6.1 P7.1 P9.1 P10.1 P11.1 P12.1 P13.1 Q5.2 Q6.2 Q7.2 Q8.2 Q13.2 Q14.2 Q15.2 Q16.2 Q26.2 Q28.2 Q29.1 R33.2 R36.2 R39.2 R46.1 R47.1 R51.1 R53.1 R57.1 R64.1 R65.1 R67.2 R69.2 R72.2 R79.1 R81.1 R82.1 R83.1 R85.1 R86.1 R89.1 R90.1 R93.1 R96.1 R98.1 R102.2 R107.1 R109.2 R116.2 R117.2 R118.2 R119.2 R125.1 R127.1 R131.1 R132.1 R133.1 R134.1 R135.1 U1.0 U1.36 U1.41 U1.44 U1.47 U2.33 U3.1 U3.5 U4.3 U5.2 U5.5 U6.4 U7.1 U7.12 U7.13 U7.17 U8.4 U9.4 U10.4 U10.9 U10.11 U11.2 U12.2 U12.5 U13.2 U13.5 U14.6 U15.9 U15.11 U16.3 U16.5 U16.8 U16.9 U17.1 U18.2 U18.3 U18.6 U18.7 U19.2 U19.5 U20.2 U22.2 U23.2 U24.9 U24.16 U25.1 U25.3 U26.1 U26.4 U27.4 U28.2 X1.2 X1.4 Y2.2 Y2.4 | length 13596.8
  Top Layer w6: Y2.2@1438.54,884.59 Y2.2@1445.41,884.59 ; Y2.4@1496.59,833.41 Y2.4@1505.46,833.41
  Top Layer w8: v1@317,600 317,603 323.89,609.89 U1.36@349.38,609.89 ; X1.4@365.41,376.54 365.41,384.54 X1.4@365.41,385.41 ; X1.2@415.59,435.59 X1.2@415.59,452.46 ; 443,621 cw(c446,611) 456,614 ; v1(445,737) 467.35,737 U1.0@486.19,718.16 ; 457.72,614 cw(c465,614) 465,621.28 ; 507,621 cw(c506.86,612.14) 515.72,612 cw(c526.86,611.86) 527,623 ; C70.1@630.56,239 635,243.44 690,243.44 C69.1@702,255.44 ; U17.1@721.02,295.47 706.47,295.47 699,288 699,258.44 C69.1@702,255.44 ; C59.1@801.44,220 737.44,220 C69.1@703.44,254 C69.1@702,255.44 ; R90.1@898.56,471 R90.1@899.56,472 ; v1@998.5,577.5 1010.38,565.62 U24.16@1010.38,546 ; U24.9@1064.2,476.38 1126.38,476.38 v1@1129,479 ; U18.7@1206.8,597.02 1187.14,597.02 v1(1178.17,606) 1188.87,616.71 U18.6@1206.8,616.71 ; U18.3@1233.37,662.97 1233.37,681.37 v1(1243,691) 1253.06,680.94 U18.2@1253.06,662.97 ; 1270,383 cw(c1269,370) 1282,369 ; 1282,370 cw(c1295,370) 1295,383 ; R89.1@1311.56,492 R89.1@1313,490.56 ; C68.2@1352.88,490.56 C68.2@1357,486.44 ; C58.1@1364.88,383 C58.1@1371,389.12 ; U15.11@1415,677 1415,743.23 1431.77,760 1464,760 1496.56,727.44 C65.2@1496.56,726 1496.56,719.03 U15.9@1454.53,677 ; Y2.2@1445.41,884.59 Y2.4@1496.59,833.41 ; C64.2@1474.76,522.8 1466,514.04 1466,407.47 U16.3@1477.58,395.89 ; v1@1475,287 v1(1475,291) 1475,353.93 U16.5@1477.58,356.52 ; 1486.96,535 v1(1507,535) v1@1507,529.26 ; U16.8@1537.62,356.52 1555,339.13 v1(1555,331) 1563,339 1563,364 1550.8,376.2 U16.9@1537.62,376.2
  Top Layer w10: C100.2@290.31,1688 C100.2@291.31,1689 ; C109.1@310,395.31 354.63,395.31 X1.4@365.41,384.54 ; X1.4@365.41,376.54 370.31,371.63 C108.2@370.31,317 ; X1.4@365.41,384.41 X1.2@415.59,434.59 ; U1.41@456.66,581.35 456.66,688.63 U1.0@486.19,718.16 515.72,688.63 U1.44@515.72,581.35 ; U1.47@574.77,581.35 574.77,553.23 C113.2@599,529 ; C56.1@738.56,506.44 762,483 762,454 v1(768,448) v1@768,447 ; v1(1170,273) 1193,296 C61.2@1194.4,296 ; U19.2@1203.6,789 1304,789 1331,816 C77.1@1331,859.44 1330,860.44 C73.1@1284,860.44 C74.1@1239,860.44 ; U13.5@1245.6,383 1282,383 ; v1(1282,338) 1282,383 ; U13.2@1320.4,383 1282,383 ; C68.2@1357,485.44 C68.2@1359.02,485.44 ; C58.1@1371,389.12 C58.1@1371.12,389.12 ; J1.3@1461,141 1461,123 1488,96 1512,96 ; J1.5@1512,140 1512,96 ; L4.2@1538.69,948 L4.2@1539,948.31 ; v1(1604,1682) 1625,1661 R46.1@1657.44,1661 ; J1.9@1610,140 1610,120 1586,96 1512,96
  Top Layer w10.42: C79.1@1505.56,946 1507.87,948.31 L4.2@1539,948.31
  Top Layer w12: P9.1@173,1018 173,956.56 C114.2@189,940.56 ; C106.1@206,1133.44 195,1122.44 v1(195,1105) 207,1093 FB2.1@222.44,1093 ; v1@437,1208 491,1208 499,1200 499,1152 519,1132 527.56,1132 C105.1@527.56,1088 ; v1(545,425) 545,424.31 C111.2@526.69,406 C110.1@557.31,406 ; v1(644,1186) 649,1191 688,1191 702,1177 U22.2@702,1150.4 ; U12.5@722.6,447 768,447 U12.2@797.4,447 ; R107.1@885.56,1138 885.56,1174.56 v1(900,1189) 924.88,1164.12 R98.1@924.88,1157 ; C57.1@898.56,418 898.56,431.61 v1@918.25,451.31 ; R90.1@898.56,471 v1@918.25,451.31 ; v1@924,451.31 v1(921,451.31) v1@918.25,451.31 ; v1(939,188) 959,188 975.47,204.47 U14.6@975.47,222.02 ; Q28.2@1019.69,1199.56 v1@1045.44,1199.56 ; C75.1@1049.44,1163 1053,1166.56 v1(1053,1198) ; v1(1067,834) 1067,838.56 C72.1@1087.44,859 ; C60.1@1136.56,360 1159.44,360 C55.1@1178,341.44 1194.4,325.04 C61.2@1194.4,296 ; C78.1@1205.36,1206 1205.36,1232.08 1184.44,1253 C82.1@1184.44,1268 1184.44,1279.44 1206,1301 1263,1301 1279.44,1284.56 C76.1@1279.44,1263 ; C67.2@1272.56,492 R89.1@1311.56,492 ; R89.1@1313,490.56 1327.44,505 v1(1344,505) ; U13.2@1320.4,383 C58.1@1364.88,383 ; C64.2@1474.76,522.8 1486.96,535 ; C65.2@1496.56,726 1515.56,745 v1(1556,745) v1@1557,745 ; Y2.4@1505.46,839.41 Y2.4@1511.37,845.31 ; v1@1507,529.26 C63.2@1529.2,507.06 ; Y2.4@1511.37,839.31 C81.2@1554,839.31 ; C63.2@1529.3,507.16 C62.2@1576.4,507.16
  Top Layer w14: v1@327,357 v1(332,357) 345.87,357 X1.4@365.41,376.54 ; v1(433,1639) 442,1630 U20.2@471.4,1630 ; C83.1@1547,1158.31 1569.69,1158.31 v1(1574,1154)
  Top Layer w16: v1(600,1686) 609,1677 R47.1@609,1602.56 ; C80.1@1390,878.69 1414.63,878.69
  Top Layer w20.2: v1(255,1642) 262.69,1649.69 C96.2@292,1649.69 ; C100.2@291.31,1689 291.31,1650.37 C96.2@292,1649.69 ; v1@311,1986 Q29.1@344.4,1952.6 ; v1(312,1835) 312,1821.06 D37.1@327.41,1805.65 333.31,1799.74 C93.2@333.31,1764 ; R102.2@314,1649.69 C96.2@292,1649.69 ; D38.1@423.41,1805.65 423.41,1776.91 C98.2@436.31,1764 ; C95.1@475.69,2034 504,2034 v1(518,2020) ; C84.1@1547,1141.69 1547,1158.31 C83.1@1547,1167.31
  Bottom Layer w8: C35.1@388.44,821 388.44,887 C34.1@426,924.56 438.56,924.56 v1(457,943) 486.84,943 C38.2@490.84,947 ; R64.1@437.44,386.44 C43.1@503,386.44 ; U7.13@501.35,744.59 452.59,744.59 v1(445,737) 483,699 483,696.56 516.56,696.56 526.94,706.94 U7.12@526.94,719 ; U7.17@526.94,744.59 U7.17@556.47,774.12 ; U7.1@526.94,829.24 U7.1@526.94,837.06 ; C41.1@713.56,834 C41.1@721,841.44 ; R67.2@714.56,733 R67.2@714.56,735 ; R57.1@734.56,894 734.56,882.81 721,869.25 C41.1@721,841.44 ; R69.2@755,845.56 725.12,845.56 C41.1@721,841.44 ; U5.5@896,1124.4 896,1130.44 C27.1@921.56,1156 ; U26.1@908.76,300.82 U26.1@916.39,300.82 ; R85.1@1385,758.44 R85.1@1394.56,768 ; U27.4@1436.41,359.6 U27.4@1437.6,359.6 ; U10.11@1502.6,1073.94 U10.11@1512.86,1063.69
  Bottom Layer w10: P13.1@105,1550 P13.1@120.44,1534.56 ; v1@180,1525 181,1525 208.56,1497.44 C115.1@208.56,1473 ; C115.1@211.56,1473 C115.1@211.56,1483.44 ; U25.1@270.39,1378.63 320.63,1378.63 341,1399 322,1418 U25.3@270.39,1418 ; U7.1@526.94,829.24 526.94,803.65 U7.17@556.47,774.12 ; C21.4@546,1463.35 547.35,1462 692,1462 Q5.2@723.6,1493.6 ; C32.1@621.44,1165 623,1165 v1(644,1186) ; R67.2@715.56,736 R67.2@717.12,737.56 ; Q5.2@723.6,1493.71 Q5.2@723.6,1493.6 ; C28.1@862.44,979 896,1012.56 U5.2@896,1036.6 ; R109.2@970,505.12 970,507 1004,541 1004,575 v1(1000,579) ; Q14.2@1021.6,1673.71 1001.89,1654 946,1654 930,1638 930,1577 945,1562 985,1562 1021.6,1525.4 Q6.2@1021.6,1493.71 ; v1(1121,477) 1147,451 C120.1@1202.44,451 ; C23.1@1143.78,1429.22 1117,1456 1042,1456 1021.6,1476.4 Q6.2@1021.6,1493.71 ; C23.1@1153,1422.44 1167.44,1422.44 1214.96,1469.96 1306.96,1469.96 1322.6,1485.6 Q7.2@1322.6,1493.71 ; C52.1@1298,808.4 C52.1@1302,804.4 ; Q15.2@1321.6,1673.71 1321.6,1664.6 1311,1654 1244,1654 1232,1642 1232,1579 1249,1562 1288,1562 1322.6,1527.4 Q7.2@1322.6,1493.71 ; C44.1@1396,1054.4 1405.6,1064 1441,1064 ; U10.4@1482.91,1015.87 U10.11@1482.91,1054.26 ; U10.9@1522.28,1132.02 1522.28,1156.28 1539,1173 1559,1173 1574,1158 v1(1574,1154) 1578.56,1158.56 R81.1@1613,1158.56 1613,1196.56 1597.56,1212 R79.1@1597.56,1199.56 ; Q8.2@1611.6,1477.4 1633,1456 1697.44,1456 C25.1@1741,1412.44 ; Q8.2@1611.6,1477.6 1602,1468 1512,1468 1460.44,1416.44 C24.1@1451,1416.44 1411.44,1456 1345,1456 1322.6,1478.4 Q7.2@1322.6,1493.71 ; Q8.2@1621.6,1493.71 1621.6,1514.4 1579,1557 1538,1557 1528,1567 1528,1637 1539,1648 1596,1648 Q16.2@1621.65,1673.65 ; C25.1@1749,1412.44 1759.44,1412.44 v1(1776,1429) ; Q5.2@723.6,1493.6 723.6,1470.4 738,1456 827.44,1456 C22.1@855,1428.44 894.56,1468 1012,1468 1021.6,1477.6 Q6.2@1021.6,1493.71
  Bottom Layer w10.42: v1@419,1764 423,1760 U3.5@423,1720.7
  Bottom Layer w12: D28.1@194,1076.17 197.83,1080 R51.1@247.44,1080 ; R65.1@371,334.44 385.44,334.44 R64.1@437.44,386.44 ; U4.3@413.4,1177.24 415.24,1177.24 434,1196 v1(434,1207) ; R119.2@422.56,1645 423.56,1644 R117.2@423.56,1553 ; U3.5@423,1720.7 423.26,1720.44 R39.2@462,1720.44 ; R116.2@423.56,1504 R117.2@423.56,1553 ; C39.1@430,270.44 467.57,270.44 512.01,226 v1(521,226) 543.56,203.44 C37.1@569,203.44 ; C21.4@523,1491 472.56,1541.44 435.12,1541.44 R117.2@423.56,1553 ; v1@557.01,423 U9.4@577.41,402.6 ; C33.1@575,1172.56 613.88,1172.56 C32.1@621.44,1165 ; U9.4@579.41,405.6 579.41,407.41 611,439 658.44,439 C42.1@677,420.44 ; U6.4@621.41,1055.6 621.41,1048.59 v1(647,1023) ; C36.1@778,981.44 780.44,979 C28.1@862.44,979 ; U5.2@896,1036.6 U5.5@896,1111.4 ; v1(900,1189) 917.56,1171.44 C27.1@917.56,1160 ; U26.1@916.39,303.61 932.83,303.61 R127.1@975.44,261 ; U26.4@916.39,380.39 952.61,380.39 975.44,357.56 R127.1@975.44,261 ; v1(939,188) 975.44,224.44 R127.1@975.44,261 ; R83.1@1225,1005.56 C49.1@1258,1005.56 1258,1007 v2@1278,1027 ; R82.1@1232,839.44 v1@1257,839.44 ; v1(1257,849) v1@1257,839.44 ; 1266,803.4 1257,812.4 v1@1257,839.44 ; C48.2@1284,839.44 v1@1257,839.44 ; C52.1@1302,804.4 1320.6,804.4 1357.56,767.44 R85.1@1383,767.44 ; Q26.2@1305.69,1125.44 1329.56,1125.44 v1(1334,1121) ; C45.1@1336,1053.4 1367.6,1053.4 v2(1376,1045) ; R85.1@1394.56,768 U11.2@1444.6,768 ; U27.4@1436.41,359.6 1464.56,331.45 R131.1@1464.56,308 ; C121.1@1437,257.44 1466.56,287 v1@1475,287 ; U10.11@1482.91,1054.26 U10.11@1502.6,1073.94 U10.11@1522.28,1093.63 ; C46.1@1550.44,940 1550.44,936 C46.1@1554.44,940 ; v1(1555,331) 1538,348 1538,376.44 C117.1@1588,376.44 ; v1(1556,745) 1556,744.6 C47.1@1583,717.6 1563,697.6 1563,675.56 1589.56,649 R125.1@1589.56,569
  Bottom Layer w14: U3.1@273,1933.3 273,1951 v1(307,1985) ; C40.1@329.2,755 329.2,743.4 356.6,716 424,716 v1(445,737) ; v1(332,357) 348.44,357 R65.1@371,334.44 ; v1(434,1207) 461,1207 473,1195 C26.1@473,1187.56 ; C21.4@547.35,1462 558,1451.35 C21.4@558,1438 ; v1(693,1721) 721.6,1692.4 Q13.2@721.6,1673.71 ; R67.2@714.56,733 714.56,722.44 734,703 826.6,703 C31.1@849.6,726 ; R69.2@755,845.56 848.16,845.56 849.6,844.12 C31.1@849.6,726 ; v1@874,738 862,726 C31.1@849.6,726 ; 1135,2154.28 1137,2156.28 ; R86.1@1182,1032.44 C54.1@1228,1032.44 1272.56,1032.44 v2@1278,1027 ; C17.2@1252,2155.28 1253,2154.28 ; v1(1334,1121) 1376.44,1163.44 C50.1@1407,1163.44 ; 1906,1670.28 C2.2@1923.28,1653
  Bottom Layer w16: C51.1@1174,803.4 C53.1@1237,803.4 1266,803.4 1301,803.4 C52.1@1302,804.4 ; 1906,1670.28 v1(1906,1697)
  Bottom Layer w20: C21.4@546,1463.35 C21.4@572.78,1490.13 ; C13.2@584,2154.28 C14.2@708,2154.28 C18.2@891,2154.28 ; C18.2@890.47,2154.8 C18.2@891,2154.28 ; C12.2@952,2153.28 951,2154.28 C18.2@891,2154.28 ; C8.2@1072,2154.28 1135,2154.28 1253,2154.28 C9.2@1312,2154.28 ; C6.2@1431,2154.28 1547,2154.28 C7.2@1551,2158.28 ; C3.2@1670,2155.28 1671,2156.28 1893,2156.28 C5.2@1902,2165.28
  Bottom Layer w24: v1(1904,1487) 1921.28,1504.28 C1.2@1921.28,1532 ; C1.2@1923.28,1532 C2.2@1923.28,1653
  other v1: 1708,132 1786,134 1754,187 1829,217 1953,217 654,253 1825,302 1950,308 1837,480 605,525 1799,547 1867,548 313,594 1795,617 1866,617 874,741 538,761 1812,773 1877,775 566,778 538,791 1717,807 1539,824 1805,844 1876,844 1714,861 1406,893 1638,904 1810,910 1760,912 1680,931 1719,932 1571,947 1899,1012 1717,1018 1827,1038 1762,1039 1870,1060 1520,1068 1718,1077 1934,1085 1830,1100 1756,1101 1807,1158 1738,1160 1187,1201 1762,1222 1831,1224 1791,1270 1795,1333 336,1400 1904,1433 534,1435 171,1525 540,1529 172,1629 48,1651 171,1679 1902,1733 414,1768 76,1773 120,1773 166,1773 546,1997 198,2129 274,2129 325,2153 482,2153 235,2164 201,2210 270,2211 407,2228 516,2233
  other v2: 1275,1027
HFXI: C109.2 U1.42 X1.3 | length 241.5
  Top Layer w10: C109.2@310,434.69 346.63,434.69 364.41,452.46 364.41,461.41 372,461.41 476.35,565.76 U1.42@476.35,581.35
HFXO: C108.1 U1.43 X1.1 | length 286.3
  Top Layer w10: C108.1@409.69,328 X1.1@409.69,376.54 ; X1.1@416.59,376.54 453,412.94 453,507 496.03,550.03 U1.43@496.03,581.35
HMC_DRDY: P6.4 U15.15 U24.12 | length 931.4
  Top Layer w8: U24.12@1064.2,523.62 1090.62,523.62 1107,540 1107,608.53 1106.76,608.76 1138,640 1138,678 1189.54,729.54 1312.46,729.54 v1(1343,699) ; v1@1335,699 1335,631 1352.84,613.16 U15.15@1371,613.16
  Signal w8: v1(1343,699) 1383,699 1606,476 P6.4@1631,476
JTAG_RST: C85.1 J1.10 Q28.3 R97.1 U2.19 | length 2135.1
  Top Layer w8: R97.1@1057.44,1247 1077,1227.44 1077,1145 v1(1106,1116) 1125.98,1096.02 U2.19@1236.61,1096.02
  Top Layer w10: C85.1@925,1255.56 991.88,1255.56 Q28.3@1000,1247.44 1000.44,1247 R97.1@1057.44,1247
  Signal w8: J1.10@1601,200 1691,200 1756,265
  Signal w10: v1(1106,1116) 1106,1155 1178,1227 1212,1227 1264,1279 1344,1279 1495,1128 1495,984.55 1756,723.55 1756,265 ; J1.10@1601,200 J1.10@1611,190
JTAG_TCK: J1.4 U2.14 | length 1505.2
  Top Layer w8: v1@1287,1200 1301.57,1185.43 U2.14@1301.57,1160.98
  Signal w8: v1@1283,1214 v1@1289,1208 ; J1.4@1460,199 1473.37,199 1527.37,253 1672.43,253 1673.43,254
  Signal w10: v1(1283,1208) 1283,1214 1283,1219 1294,1230 1324.94,1230 1447,1107.94 1447,964.67 1708,703.67 1708,288.57 1673.43,254 ; J1.4@1460,190 J1.4@1460,199
JTAG_TDI: J1.8 U2.16 | length 1589.6
  Top Layer w8: v1@1240,1168 1247.02,1160.98 U2.16@1262.2,1160.98
  Signal w8: J1.8@1560,204.12 1580.88,225 1693,225 1694,226
  Signal w10: v1(1242,1168) 1224,1186 1224,1211 1275,1262 1338.2,1262 1479,1121.2 1479,977.92 1740,716.92 1740,272 1694,226 ; J1.8@1560,190 J1.8@1560,204.12
JTAG_TDO: J1.6 U2.15 | length 1549.8
  Top Layer w8: v1@1256,1202 1281.89,1176.11 U2.15@1281.89,1160.98
  Signal w8: v1@1250,1208 v1@1256,1202 ; J1.6@1510,200 1549,239 1682,239 1683,240
  Signal w10: v1(1250,1202) 1250,1208 1250,1210 1286,1246 1331.57,1246 1463,1114.57 1463,971.3 1724,710.3 1724,281 1683,240 ; J1.6@1510,190 J1.6@1510,200
JTAG_TMS: J1.2 U2.13 | length 1477.1
  Top Layer w8: v1@1318,1202 1321.26,1198.74 U2.13@1321.26,1160.98
  Signal w8: v1@1318,1200.28 v1@1318,1202 ; J1.2@1410,190 1451,231 1485.57,231 1522.57,268
  Signal w10: v1(1315,1206) 1323,1206 1431,1098 1431,958.04 1507,882.04 1507,821 1541,787 1602.04,787 1692,697.04 1692,295.2 1664.8,268 1522.57,268
LFXI: C111.1 U1.45 X2.1 | length 180.3
  Top Layer w10: C111.1@483.31,408 483.31,457.53 X2.1@492.79,467 ; X2.1@492,489 504,489 535.4,520.4 U1.45@535.4,581.35
LFXO: C110.2 U1.46 X2.2 | length 191.6
  Top Layer w10: U1.46@555.09,581.35 555.09,517.91 591.21,481.79 591.21,467 596.69,461.53 C110.2@596.69,407
LPS_INT: P6.2 U16.7 U24.7 | length 759
  Top Layer w8: U24.7@1041.87,454 1041.87,433.13 1048,427 1140,427 1171,458 1347,458 v1(1371,434) ; U16.7@1517.44,346.18 1517.44,309.56 v1@1518,309
  Signal w8: v1@1382,434 1507,309 1508,310 v1(1523,310) 1522,310 1522,336.83 1561.17,376 P6.2@1631,376
LSM_INT_1: P6.6 U18.4 U24.11 | length 813.1
  Top Layer w8: U24.11@1064.2,507.87 1094.87,507.87 1110,523 1139,523 v1@1140,524 ; v1@1189.03,662.97 U18.4@1213.69,662.97
  Signal w8: v1@1141,527 1141,622 v1(1182,663) 1253,663 1328,738 1383.6,738 1552.6,569 1624,569 P6.6@1631,576
  other v1: 1144,524
LSM_INT_2: P6.5 U18.9 U24.8 | length 874.1
  Top Layer w8: U24.8@1057.62,454 1147,454 1190,497 1190,527 v1(1188,529) ; U18.9@1233.37,570.45 1233.37,546.63 v1(1240,540)
  Signal w8: v1(1188,529) 1229,529 v1(1240,540) 1240,629 1335,724 1377.8,724 1575.8,526 P6.5@1631,526
MIC_OUT: C101.2 R103.2 U1.6 U22.4 | length 672.4
  Top Layer w10: v1(561,1075) 566.56,1069.44 R103.2@589,1069.44 ; U1.6@623,708.31 720.31,708.31 v1@747,735
  Top Layer w12: R103.2@589,1069.44 C101.2@637,1069.44 643.16,1075.6 U22.4@676.41,1075.6
  Signal w12: v1(561,1075) 561,1007 747,821 v1@747,735
  other v1: 748,738
NetANT1_1: ANT1.1 C91.2 R99.2 | length 101.3
  Top Layer w18.11: R99.2@1931.69,973 1934,975.31 C91.2@1934,1004.31 ; R99.2@1933.47,975 2002.5,975
NetC20_2: C20.2 C21.2 R34.1 R36.1 | length 189.5
  Bottom Layer w14: C21.2@545,1798 C21.2@546.5,1796.5 ; C20.2@546,1796 C21.2@546.5,1796.5 ; R34.1@571.56,1870 571.56,1821.56 C21.2@546.5,1796.5 ; R36.1@609,1719.56 609,1734 C21.2@546.5,1796.5
NetC20_3: C20.3 C21.3 R33.1 R35.2 R37.2 | length 199.7